# Altium PCB CU.PcbDoc
Units mil, origin at the board's own origin, x right, y up, seen from the top; angles counter-clockwise.
Board outline 1496.06 x 1259.84 mil, 2 copper layers (Top Layer, Bottom Layer); 59 components, 47 nets, 218 pads, 17 vias.
Unrouted connection lines stored in the file: 1.
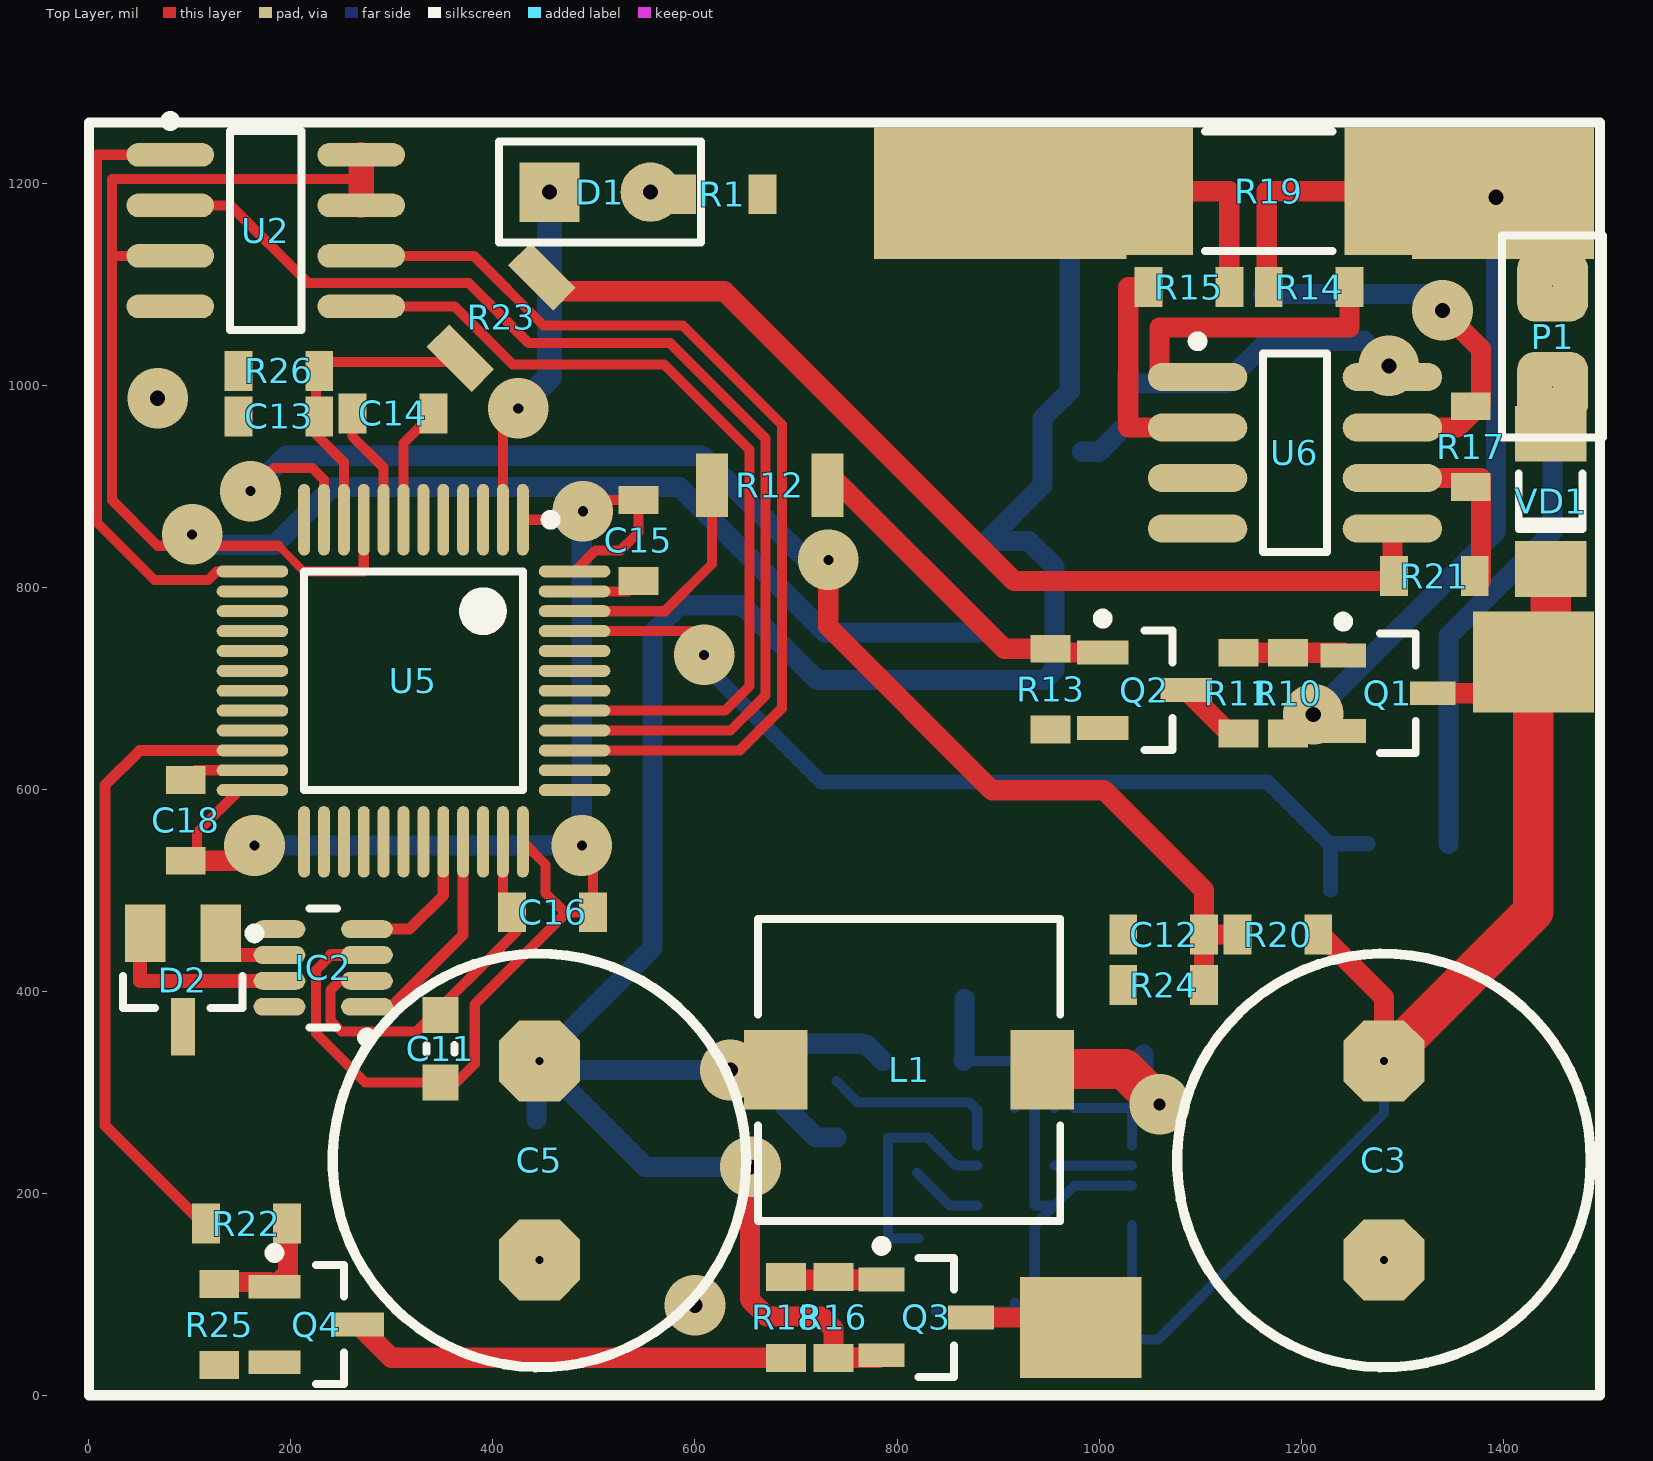
[diagram p0: Top Layer view]
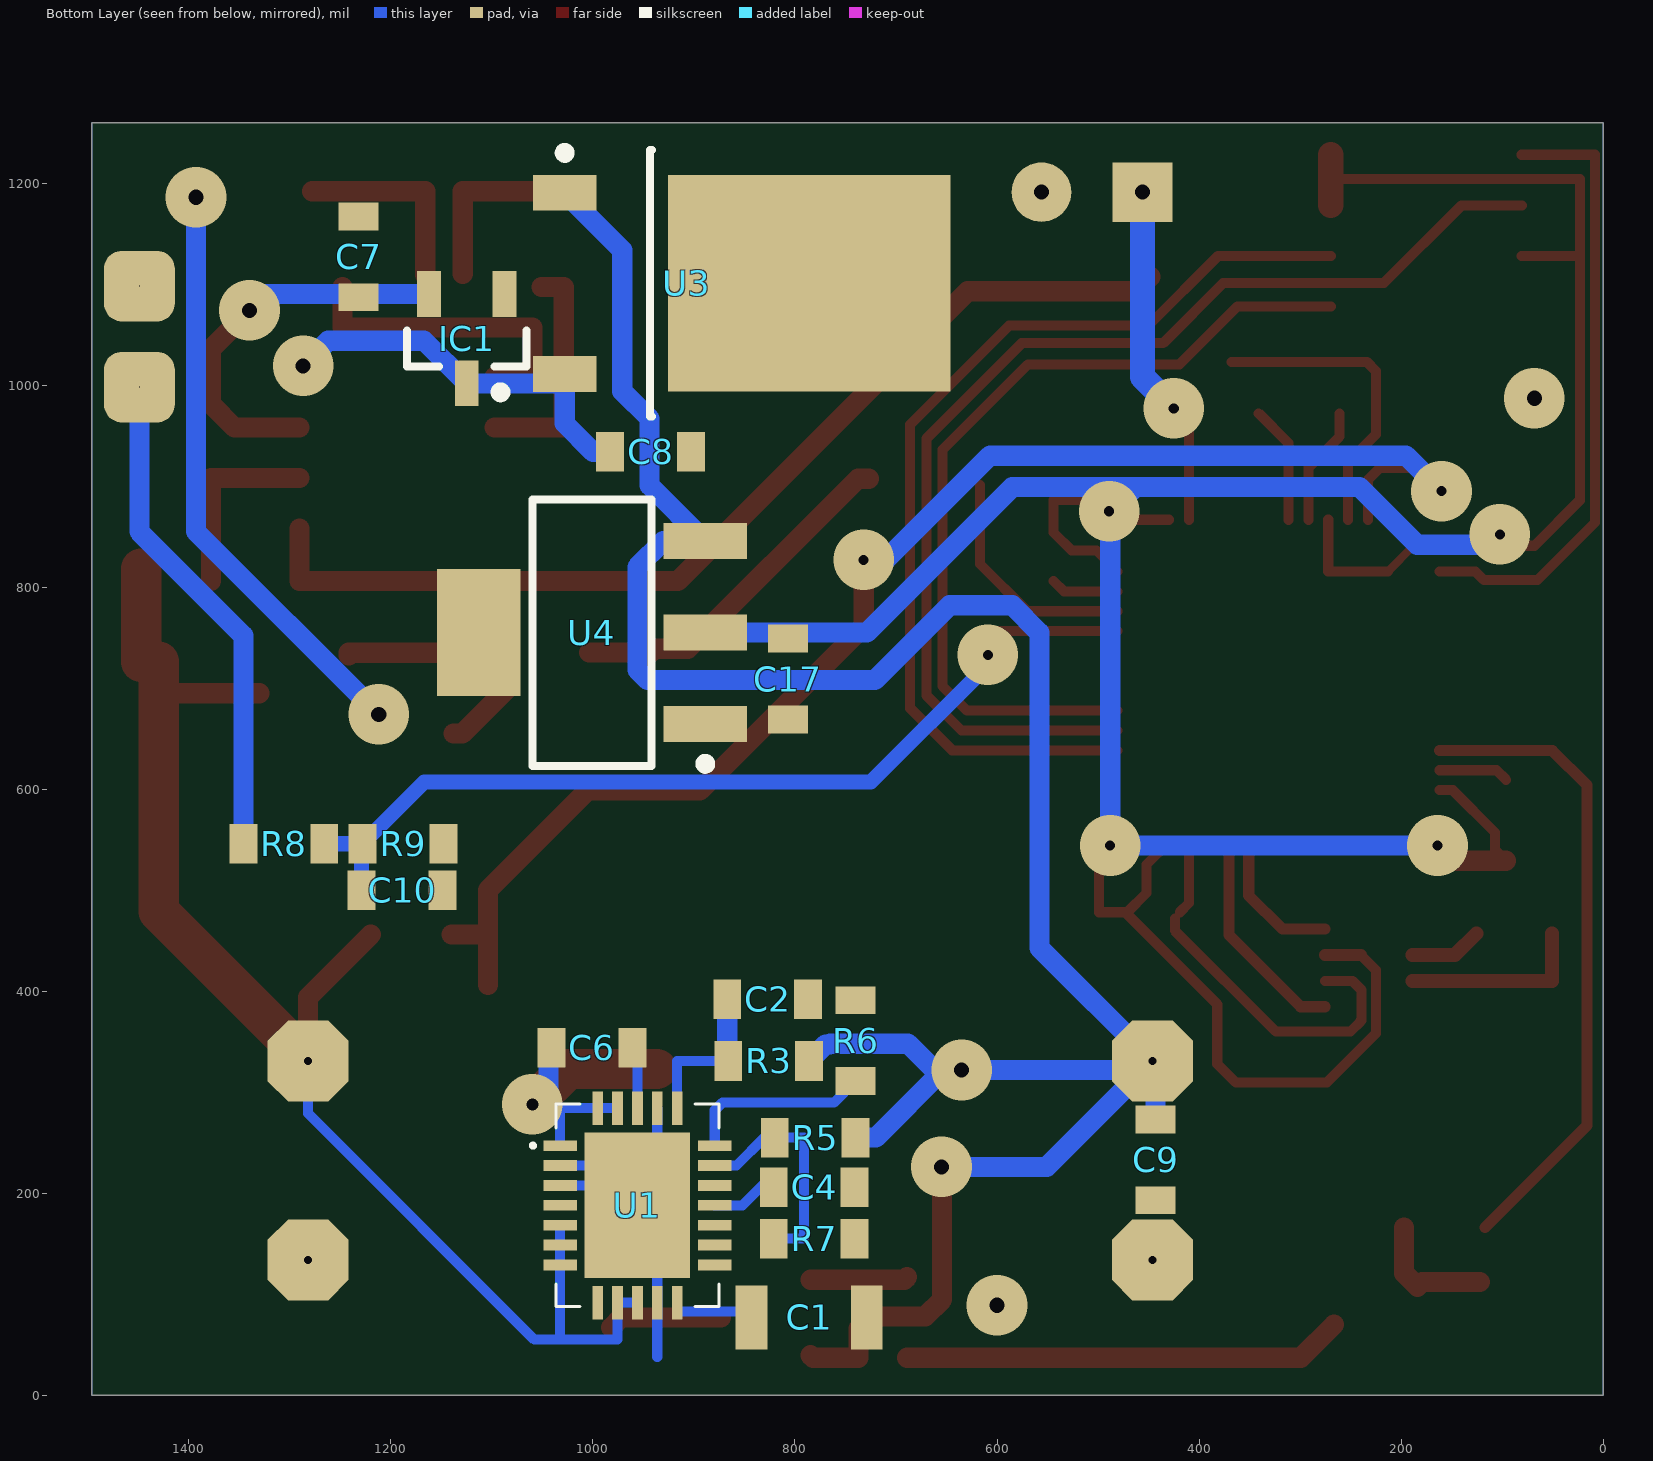
[diagram p1: Bottom Layer view, seen from below]

## Layer stack, top to bottom
Top Solder: solder mask 0.4, Solder Resist, Dk 3.5
Top Layer: signal copper 1.4
Dielectric 1: dielectric 12.6, FR-4, Dk 4.8
Bottom Layer: signal copper 1.4
Bottom Solder: solder mask 0.4, Solder Resist, Dk 3.5

## Board outline
0,0 0,1259.84 1496.06,1259.84 1496.06,0

## Design rules (kind name [scope] priority, off if disabled: settings)
Clearance [All] p1: gap=5 ignorepadtopadclearanceinfootprint=FALSE except(0: Arc-Hole Track-Hole SMDPad-Hole THPad-Hole Via-Hole Fill-Hole Poly-Hole Region-Hole Text-Hole; 10: Arc-Poly Track-Poly SMDPad-Poly THPad-Poly Via-Poly Fill-Poly Poly-Poly)
ComponentClearance [All] p1 off: gap=10 collisioncheckmode=3 verticalgap=10 showdistances=FALSE
Height [All] p1 off: minheight=0 maxheight=1000 prefheight=500
MinimumSolderMaskSliver [All] p1 off: minsoldermaskwidth=10
PolygonConnect [All] p1: connectstyle=Direct reliefconductorwidth=10 reliefentries=4 polygonreliefangle="90 Angle" airgapwidth=10
RoutingVias [All] p1: holewidth=28 width=60 viastyle="Through Hole" minholewidth=1 minwidth=1 maxholewidth=280 maxwidth=500
SilkToSilkClearance [All] p1 off: silktosilkclearance=10
SilkToSolderMaskClearance [IsPad] p1 off: minsilkscreentomaskgap=10 clearancetoexposedcopper=TRUE
SolderMaskExpansion [All] p1: expansion=4
Width [All] p1: maxlimit=200 minlimit=5 preferedwidth=10
25 further rules are at their usual default settings.

## Classes and differential pairs
net class CAN: CAN_RX CAN_TX

## Components (designator, comment, footprint, x,y, rotation, side; value= is the part's Value field where it differs from the comment)
C1 "10uF" 1206x 786,77 r180 bottom value=100pF
C2 "0.1u" 0603x 827,392 r180 bottom value=100pF
C3 "100u 63V" CAP_ELEC_10mm 1282,232.43 r0 top value=100pF
C4 "22nF" 0603x 781,206 r0 bottom value=100pF
C5 "1000u 25V" CAP_ELEC_10mm 446,232.43 r0 top value=100pF
C6 "0.1u" 0603x 1001,344 r0 bottom value=100pF
C7 "Cap" 0603x 1232,1127 r90 bottom value=10n
C8 "Cap" 0603x 943,934 r180 bottom value=10n
C9 "Cap" 0603x 443,233 r270 bottom value=10n
C10 "Cap" 0603x 1189,500 r180 bottom value=10n
C11 "0.1u" CAPC1608X08N(0603) 348,343 r270 top value="CAP CER 0.1UF 50V X7R 0603"
C12 "Cap" 0603x 1064,456 r180 top value=10n
C13 "Cap" 0603x 188,969 r180 top value=10n
C14 "Cap" 0603x 301,972 r0 top value=100nF
C15 "Cap" 0603x 543.98,846.17 r90 top value=100nF
C16 "Cap" 0603x 458.98,478.17 r0 top value=100nF
C17 "Cap" 0603x 807,709 r90 bottom value=100nF
C18 "Cap" 0603x 95.98,569.17 r270 top value=100nF
D1 "LED0" HDR1X2#1 456,1191 r0 top
D2 "NUP2105LT1G" SOT-23_M 93,411 r270 top
IC1 "LT1460KCS3-3.3" SOT23_N#1 1125,1046 r270 bottom value="Voltage reference 3.3V 0.5% 50ppm/C"
IC2 "TCAN332GDCNT" SOT23-8_L 232,423 r180 top
L1 "Inductor" DR74 812,322 r0 top value=33u
P1 "Header 2" HDR1X2#2 1449,1098 r270 top
Q1 "IRLML6401" Micro3_N 1286,695 r0 top
Q2 "2N7002" SOT23_N#2 1045,698 r0 top
Q3 "IRLML6401" Micro3_N 829,77 r0 top
Q4 "2N7002" SOT23_N#2 225,70 r0 top
R1 "Res1" 0603x 627,1189 r0 top value=1K
R3 "Res1" 0603x 826,331 r180 bottom value=4.7R
R5 "Res1" 0603x 780,255 r180 bottom value=18k
R6 "Res1" 0603x 740,351 r90 bottom value=18k
R7 "Res1" 0603x 781,155 r0 bottom value=18k
R8 "Res1" 0603x 1306,546 r0 bottom value=18k
R9 "Res1" 0603x 1188,546 r0 bottom value=18k
R10 "Res1" 0603x 1187,695 r90 top value=1K
R11 "Res1" 0603x 1138,695 r270 top value=1K
R12 "Res1" 1206x 674,901 r0 top value=1K
R13 "Res1" 0603x 952,699 r90 top value=1K
R14 "Res1" 0603x 1208,1097 r180 top value=1K
R15 "Res1" 0603x 1089,1097 r0 top value=1K
R16 "Res1" 0603x 737,77 r90 top value=1K
R17 "Res1" 0603x 1368,939 r270 top value=1K
R18 "Res1" 0603x 690,77 r270 top value=1K
R19 "Res1" 2512 1168,1192 r0 top value=10mR
R20 "Res1" 0603x 1177,456 r180 top value=1K
R21 "Res1" 0603x 1332,811 r180 top value=1K
R22 "Res1" 0603x 156,170 r0 top value=1K
R23 "Res1" 1206x 408,1067 r225 top value=1K
R24 "Res1" 0603x 1064,406 r180 top value=1K
R25 "Res1" 0603x 129,70 r90 top value=1K
R26 "Res1" 0603x 188,1014 r0 top value=1K
U1 "MAX17574ATG+" QFN50P500X400X80-25N 956,188 r180 bottom
U2 "25AA010A-I/MS" SO-8_N 175,1153 r0 top
U3 "LM78M05CDTX" TO-252AA_L 852.8,1100.76 r180 bottom
U4 "REG1117-3.3" SOt-223_L 1001,755 r0 bottom
U5 "STM32F303C8T6" LQFP48_N 321.29,707.27 r270 top
U6 "MAX9918" SO8_M 1194,933 r0 top
VD1 "Diode" SOD-80/MLL34 1447,884.93 r270 top

## Footprints (in the part's own frame and the unit in brackets; to place one, negate y for a bottom-side part, rotate by r counter-clockwise, add the part's x,y. Pads: shape width x height; smd on the part's side, far side on the other; paste and mask are expansions set on the pad)
0603x [mm] "Chip Resistor; Body 1.6 x 0.8 mm (LxW typ)"
  rect 0.7x1 smd: 1(-1.016,0) 2(1.016,0)
1206x [mm]
  rect 0.8x1.6 smd: 1(-1.45,0) 2(1.45,0)
2512 [mm] "Chip Resistor; Body 6.4 x 3.2 mm (LxW typ)"
  rect 1.8x3.2 smd: 1(-2.8,0) 2(2.8,0)
  silkscreen extent -1.6,-1.5 1.6,1.5
CAP_ELEC_10mm [mil]
  oct 80x80 hole 7.87: 1(0,98.43) 2(0,-98.43)
  silkscreen extent -205,-205 205,205
CAPC1608X08N(0603) [mm] "Chip Capacitor, 2-Leads, Body 1,60x0,80mm, IPC Medium Density"
  rect 0.9x0.9 smd: 1(-0.85,0) 2(0.85,0)
  silkscreen extent -0.1,-0.35 0.1,0.35, body extent -0.8,-0.4 0.8,0.4, height 0.8
DR74 [mm] "Precision Wire Wound Inductor, 2-Leads, Body 7,60x7,60mm, IPC High Density"
  rect 1.6x2 smd: 1(3.35,0) 2(-3.35,0)
  silkscreen extent -3.8,-3.8 3.8,3.8, body extent -3.8,-3.8 3.8,3.8, height 4.35
HDR1X2#1 [mm] "Connector; Header; 2 Position"
  rect 1.5x1.5 hole 0.381: 1(0,0)
  round 1.5 hole 0.381: 2(2.54,0)
  silkscreen extent -1.27,-1.27 3.81,1.27
HDR1X2#2 [mm] "Connector; Header; 2 Position"
  rrect50% 1.778x1.778 hole 0.025: 1(0,0) 2(2.54,0)
  silkscreen extent -1.27,-1.27 3.81,1.27
LQFP48_N [mm] "Thin QFP, 48-Leads, Body 7x7mm, Pitch 0.5mm, IPC Medium Density"
  oval 1.8x0.3 smd: 1(-4.05,2.75) 2(-4.05,2.25) 3(-4.05,1.75) 4(-4.05,1.25) 5(-4.05,0.75) 6(-4.05,0.25) 7(-4.05,-0.25) 8(-4.05,-0.75) 9(-4.05,-1.25) 10(-4.05,-1.75) 11(-4.05,-2.25) 12(-4.05,-2.75) 25(4.05,-2.75) 26(4.05,-2.25) 27(4.05,-1.75) 28(4.05,-1.25) 29(4.05,-0.75) 30(4.05,-0.25) 31(4.05,0.25) 32(4.05,0.75) 33(4.05,1.25) 34(4.05,1.75) 35(4.05,2.25) 36(4.05,2.75)
  oval 0.3x1.8 smd: 13(-2.75,-4.05) 14(-2.25,-4.05) 15(-1.75,-4.05) 16(-1.25,-4.05) 17(-0.75,-4.05) 18(-0.25,-4.05) 19(0.25,-4.05) 20(0.75,-4.05) 21(1.25,-4.05) 22(1.75,-4.05) 23(2.25,-4.05) 24(2.75,-4.05) 37(2.75,4.05) 38(2.25,4.05) 39(1.75,4.05) 40(1.25,4.05) 41(0.75,4.05) 42(0.25,4.05) 43(-0.25,4.05) 44(-0.75,4.05) 45(-1.25,4.05) 46(-1.75,4.05) 47(-2.25,4.05) 48(-2.75,4.05)
  silkscreen extent -4.17,-2.75 2.75,3.58, body extent -3.5,-3.5 3.5,3.5, height 1.6
Micro3_N [mm] "SOT23, 3-Leads, Body 2.9x1.3mm, Pitch 0.95mm, Lead Span 2.3mm, IPC Medium Density"
  rect 1.15x0.6 smd: 1(-1.125,0.95) 2(-1.125,-0.95) 3(1.125,0)
  silkscreen extent -1.25,-1.5 0.7,1.92, body extent -0.7,-1.5 0.7,1.5, height 1.12
QFN50P500X400X80-25N [mm]
  rect 0.84x0.27 smd: 1(-1.945,1.5) 2(-1.945,1) 3(-1.945,0.5) 4(-1.945,0) 5(-1.945,-0.5) 6(-1.945,-1) 7(-1.945,-1.5) 13(1.945,-1.5) 14(1.945,-1) 15(1.945,-0.5) 16(1.945,0) 17(1.945,0.5) 18(1.945,1) 19(1.945,1.5)
  rect 0.27x0.84 smd: 8(-1,-2.445) 9(-0.5,-2.445) 10(0,-2.445) 11(0.5,-2.445) 12(1,-2.445) 20(1,2.445) 21(0.5,2.445) 22(0,2.445) 23(-0.5,2.445) 24(-1,2.445)
  rect 2.65x3.65 smd: 25(0,0)
  silkscreen extent -2.68,-2.55 2.05,2.55
SO8_M [mm] "SOIC, 8-Leads, Body 4.9x3.9mm, Pitch 1.27mm, IPC Low Density"
  oval 2.5x0.7 smd: 1(-2.45,1.905) 2(-2.45,0.635) 3(-2.45,-0.635) 4(-2.45,-1.905) 5(2.45,-1.905) 6(2.45,-0.635) 7(2.45,0.635) 8(2.45,1.905)
  silkscreen extent -2.57,-2.5 0.8,2.93, body extent -2,-2.5 2,2.5, height 1.75
SO-8_N [mm] "SOIC, 8-Leads, Body 4.9x3.9mm, Pitch 1.27mm, IPC Medium Density"
  oval 2.2x0.6 smd: 1(-2.4,1.905) 2(-2.4,0.635) 3(-2.4,-0.635) 4(-2.4,-1.905) 5(2.4,-1.905) 6(2.4,-0.635) 7(2.4,0.635) 8(2.4,1.905)
  silkscreen extent -2.52,-2.5 0.9,2.88, body extent -2,-2.5 2,2.5, height 1.75
SOD-80/MLL34 [mm] "Metal Electrode Face (MELF) Diode; Body 3.5 x 1.7 mm (LxDia)"
  rect 1.4x1.8 smd: 1(-1.7,0) 2(1.7,0)
  silkscreen extent -0.7,-0.8 0.7,0.8
SOT23-8_L [mm] "SOP, 8-Leads, Body 2.9x1.6mm, Pitch 0.65mm, IPC High Density"
  oval 1.3x0.45 smd: 1(-1.1,0.975) 2(-1.1,0.325) 3(-1.1,-0.325) 4(-1.1,-0.975) 5(1.1,-0.975) 6(1.1,-0.325) 7(1.1,0.325) 8(1.1,0.975)
  silkscreen extent -1.22,-1.5 0.35,1.87, body extent -0.88,-1.5 0.88,1.5, height 1.45
SOT23_N#1 [mm] "SOT23, 3-Leads, Body 2.9x1.3mm, Pitch 0.95mm, Lead Span 2.3mm - Reverse Pinning, IPC Medium Density"
  rect 1.15x0.6 smd: 1(1.125,0) 2(-1.125,-0.95) 3(-1.125,0.95)
  silkscreen extent -0.2,-1.5 1.47,1.5, body extent -0.7,-1.5 0.7,1.5, height 1.1
SOT23_N#2 [mm] "SOT23, 3-Leads, Body 2.9x1.3mm, Pitch 0.95mm, Lead Span 2.3mm, IPC Medium Density"
  rect 1.3x0.6 smd: 1(-1.05,0.95) 2(-1.05,-0.95) 3(1.05,0)
  silkscreen extent -1.17,-1.5 0.7,1.92, body extent -0.7,-1.5 0.7,1.5, height 1.1
SOT-23_M [mm] "SOT23, 3-Leads, Body 2.9x1.3mm, Pitch 0.95mm, Lead Span 2.5mm, IPC Low Density"
  rect 1.45x1.016 smd: 1(-1.175,0.95) 2(-1.175,-0.95)
  rect 1.45x0.6 smd: 3(1.175,0)
  silkscreen extent -1.3,-1.5 0.7,1.93, body extent -0.7,-1.5 0.7,1.5, height 1.1
SOt-223_L [mm] "SOT223, 4-Leads, Body 6.5x3.5mm, Pitch 2.3mm, Lead Span 7mm, IPC High Density"
  rect 2.1x0.9 smd: 1(-2.85,2.3) 2(-2.85,0) 3(-2.85,-2.3)
  rect 2.1x3.2 smd: 4(2.85,0)
  silkscreen extent -2.97,-3.35 1.5,3.42, body extent -1.85,-3.35 1.85,3.35, height 1.8
TO-252AA_L [mm] "D-PAK, 4-Leads, Body 6.1x6.5mm, Pitch 2.28mm, Lead Span 9.9mm, IPC High Density"
  rect 1.6x0.9 smd: 1(-4.45,2.28) 3(-4.45,-2.28)
  rect 7.1x5.45 smd: 4(1.7,0)
  silkscreen extent -4.57,-3.35 -2.25,3.4, body extent -2.3,-3.37 4.05,3.37, height 2.38

## Part data
C1 C2 C3 C4 C5 C6: library part Cap, "Capacitor", LatestRevisionDate=17-Jul-2002, LatestRevisionNote="Re-released for DXP Platform.", PackageDescription="Radial Cap, Thru-Hole; 2 Leads; 0.3 in Pin Spacing", PackageReference=RAD-0.3, Published=8-Jun-2000, Publisher="Altium Limited"
C7 C8 C9 C10 C12 C13 C14 C15 C16 C17 C18: "Capacitor", LatestRevisionDate=17-Jul-2002, LatestRevisionNote="Re-released for DXP Platform.", PackageDescription="Radial Cap, Thru-Hole; 2 Leads; 0.3 in Pin Spacing", PackageReference=RAD-0.3, Published=8-Jun-2000, Publisher="Altium Limited"
C11: library part "Ceramic Chip Capacitor", Package=0603, Distributor="AVX Corporation", Order Number=06035C104KAT2A
D1: "Typical INFRARED GaAs LED", LatestRevisionDate=08-Jul-2005, LatestRevisionNote="Mech Layer 1 removed.", PackageDescription="LED; 2 Leads", PackageReference=LED-0, Published=8-Jun-2000, Publisher="Altium Limited"
D2: library part BAT54A, "Schottky Barrier Double Diode", Package=SOT23, ComponentLink1Description="Manufacturer Link", ComponentLink1URL=http://www.semiconductors.philips.com/, Distributor="ON Semiconductor", LatestRevisionNote="IPC-7351 Footprint Added.", Order Number=NUP2105LT1G, PackageDescription="3-Pin SOT-23 Package 0.95 mm Pitch, 2.3 mm Lead Span"
IC1: library part PreciseRef, Package=SOT23, Distrubutor="Linear Technology", Order Number=LT1460KCS3-3.3#TRMPBF
IC2: Package=SOT23-8, Distributor="Texas Instruments", Order Number=TCAN332GDCNT
P1: "Header, 2-Pin", LatestRevisionDate=17-Jul-2002, LatestRevisionNote="Re-released for DXP Platform.", Publisher="Altium Limited"
Q1 Q3: "HEXFET Power MOSFET", ComponentLink1Description="Manufacturer Link", ComponentLink1URL=http://www.irf.com/, ComponentLink2Description=Datasheet, ComponentLink2URL=http://www.irf.com/product-info/datasheets/data/IRLML6401.pdf, DatasheetVersion=2-Jul-2001, PackageDescription="3-Pin SOT-23 Package 0.95 mm Pitch, 2.3 mm Lead Span", PackageReference=Micro3, PackageVersion=Jul-2001, Published=17-Sep-2003, Publisher="Altium Limited"
Q2 Q4: "N-channel Enhancement Mode Field-effect Transistor", ComponentLink1Description="Manufacturer Link", ComponentLink1URL=http://www.semiconductors.philips.com/, ComponentLink2Description=Datasheet, ComponentLink2URL=http://www.semiconductors.philips.com/acrobat/datasheets/2N7002_4.pdf, DatasheetVersion=27-Jul-2000, LatestRevisionDate=12-Dec-2006, LatestRevisionNote="IPC-7351 Footprint Added.", PackageDescription="3-Pin SOT-23 Package 0.95 mm Pitch, 2.3 mm Lead Span", PackageReference=SOT23, PackageVersion=May-1999, Published=17-Sep-2003, Publisher="Altium Limited"
R1 R3 R5 R6 R7 R8 R9 R10 R11 R12 R13 R14 R15 R16 R17 R18 R19 R20 R21 R22 R23 R24 R25 R26: "Resistor", LatestRevisionDate=17-Jul-2002, LatestRevisionNote="Re-released for DXP Platform.", PackageDescription="Axial Device, Thru-Hole; 2 Leads; 0.3 in Pin Spacing", PackageReference=AXIAL-0.3, Published=8-Jun-2000, Publisher="Altium Limited"
U1: "IC REG BUCK ADJ 3A SYNC 24TQFN", Package="TQFN-24 Maxim Integrated", Digi-Key_Part_Number=MAX17574ATG+-ND, Digi-Key_Purchase_URL=https://www.digikey.com/product-detail/en/maxim-integrated/MAX17574ATG-/MAX17574ATG--ND/6579157?WT.z_cid=ref_snapeda&utm_source=snapeda&utm_medium=aggregator&utm_campaign=buynow, MF="Maxim Integrated", MP=MAX17574ATG+
U2: "1K SPI Bus Serial EEPROM, 8-Pin MSOP, Industrial Temperature", Supplier Part Number 1=25AA010A-I/MS-ND, ComponentLink1Description=Datasheet, ComponentLink1URL=http://ww1.microchip.com/downloads/en/DeviceDoc/21832E.pdf, ComponentLink2Description="Packaging Specification", ComponentLink2URL=http://www.microchip.com/stellent/groups/techpub_sg/documents/packagingspec/en012702.pdf, ComponentLink3Description="Microchip.com Home", ComponentLink3URL=http://www.microchip.com/, DatasheetVersion="revE, Sep-2008", LatestRevisionDate=02-Dec-2009, LatestRevisionNote="Updated to datasheet revision E, Jan-2008", PackageDescription="8-Lead Plastic Micro Small Outline Package (MS) [MSOP]", PackageReference=MSOP-MS8, PackageVersion="revBB, Aug-2009", Published=29-Jan-2009, Publisher="Altium Limited", Supplier 1=Digi-Key, Supplier 2=Farnell, Supplier Part Number 2=1331337
U3: "3-Terminal Positive Voltage Regulators, 3-pin TO-252", Manufacturer="National Semiconductor", PackageTopMarking=NSUZXYTT*LM78M05*CDT, PowerWise=N, Code_JEDEC=TO-252-AA, ComponentLink1Description="LM78M05 Datasheet", ComponentLink1URL=http://www.national.com/ds/LM/LM78M05.pdf, ComponentLink2Description="LM78M05 Web Page", ComponentLink2URL=http://www.national.com/pf/LM/LM78M05.html, ComponentLink3Description="TD03B Package Page", ComponentLink3URL=http://www.national.com/packaging/folders/td03b.html, CompType="LDO IC", DatasheetVersion=Aug-2005, PackageDescription="TO252, Molded, Jedec, 6.8 x 6.10 x 2.30mm Body, 3 Lead, 2.28mm Pitch, Surface Mount", PackageReference=TD03B, PackageVersion="revD, Feb-2009", PartNumber=LM78M05CDTX, PinCount=3, Published=1-Mar-2010, Publisher="Altium Limited", RoHS=N
U4: "800mA and 1A Low Dropout Positive Regulator 2.85V, 3.3V, 5V, and Adjustable", ComponentLink1Description="Manufacturer Link", ComponentLink1URL=http://www.ti.com/, ComponentLink2Description=Datasheet, ComponentLink2URL=http://www-s.ti.com/sc/ds/REG1117.pdf, DatasheetVersion=Sep-1997, LatestRevisionDate=17-Jul-2002, LatestRevisionNote="Re-released for DXP Platform.", PackageDescription="SOT-223/SC-73; 4 Leads; Body 6.7 x 7.3 mm, inc. leads (LxW max)", PackageReference=ZZ311, PackageVersion=revC, Published=8-Jun-2000, Publisher="Altium Limited"
U5: library part STM32F103C6T6, "STM32 ARM-based 32-bit MCU with 32 Kbytes Flash, 48-pin LQFP, Industrial Temperature", ComponentLink1Description="Manufacturer Link", ComponentLink1URL=www.st.com/stm32, ComponentLink2Description=Datasheet, ComponentLink2URL=http://www.st.com/stonline/products/literature/ds/13587.pdf, DatasheetVersion="rev6, Mar-2008", PackageDescription="48-Pin Low-Profile Quad Flat Pack, 7 x 7 mm Body, 0.5 mm Pitch (LQFP48)", PackageReference=LQFP48, PackageVersion=Mar-2008, Published=30-May-2008, Publisher="Altium Limited"
VD1: "Default Diode", Code_JEDEC=DO-214-AB, LatestRevisionDate=17-Jul-2002, LatestRevisionNote="Re-released for DXP Platform.", PackageDescription="DO-214-AB/SMC; 2 C-Bend Leads; Body 7.9 x 5.9 mm, inc. leads (LxW)", PackageReference=SMC, PackageVersion=Sep-1996, Published=8-Jun-2000, Publisher="Altium Limited"
L1: Code_IEC=1005, Code_JEITA=0402, LatestRevisionDate=29-May-2009, LatestRevisionNote="IPC-7351 Footprint Added.", PackageDescription="Chip Inductor", PackageReference=0402-A, Published=8-Jun-2000, Publisher="Altium Limited"

## Free pads (board coordinates)
  rect 250x130 smd: 2(902,1190)
  rect 180x130 smd: 2(1400,1190)
  rect 120x100 smd: 2(1430,726) 3(982,67)

## Via types
v1: diameter 60, hole 15, Top Layer to Bottom Layer, 8 vias
v2: diameter 60, hole 10, Top Layer to Bottom Layer, 8 vias
v3: diameter 60, hole 11.81, Top Layer to Bottom Layer, 1 vias

## Nets (pads, with @x,y where several pads share a name; then routed paths per layer and width w, separated by ;. In a path a pad name is that pad's centre, name@x,y a point inside that pad or via, vN(x,y) a via of type N, cw(c..) or ccw(c..) an arc to the next point about the centre after c; other vN are vias at no path point)
3V3: C11.2 C15.2 C16.2 C17.2 C18.2 IC2.3 U2.3 U2.7 U2.8 U4.2 U4.4 U5.1 U5.9 U5.24 U5.36 U5.48 | length 3658.7
  Top Layer w8: 187.56,841 213.02,815.54
  Top Layer w10: U2.3 23,1128 ; C18.2 106.98,540.17 106.98,557.17 148.81,599 U5.24 ; 187.56,841 68,841 23,886 23,1128 ; 213.02,815.54 272.08,815.54 U5.9 ; 239.8,435.8 225,421 225,358 273.46,309.54 C11.2 363.54,309.54 382,328 382,387 473.17,478.17 ; 269.49,1213.49 260,1204 23,1204 23,1128 ; U5.36 451.98,525.4 451.98,497.17 470.98,478.17 473.17,478.17 ; U5.1 480.53,866.72 v2(488.98,875.17) 499.98,886.17 C15.2 543.98,854.17 525.98,836.17 501.37,836.17 U5.48 ; v2(487.98,544.17) 498.98,533.17 C16.2 473.17,478.17
  Top Layer w12: 239.8,435.8 IC2.3
  Top Layer w20: C18.2 148.98,529.17 v2(163.98,544.17)
  Top Layer w25: U2.7 269.49,1213.49 U2.8
  Bottom Layer w20: v2(102.19,852.19) 112.37,842 184,842 241,899 463.14,899 ; v2(163.98,544.17) v2(487.98,544.17) 487.98,874.17 463.14,899 ; U4.2 729,755 585,899 463.14,899
5V: C8.1 IC1.1 U3.3 U6.8 | length 408.8
  Top Layer w20: v1(1287,1019) 1287,1011.46 U6.8
  Bottom Layer w20: C8.1 1000,934 1028,962 U3.3 1037.29,1001.71 IC1.1 1167.29,1044 1262,1044 v1(1287,1019)
12V: C5.1 C9.1 L1.2 Q3.2 R3.2 R5.2 R16.1 U3.1 U4.3 | length 2576.5
  Top Layer w20: v1(655,226) 654.31,225.31 654.31,94.69 671,78 725,78 737,66 R16.1 782.11,37 Q3.2
  Bottom Layer w20: C9.1 443,327.85 C5.1 ; v1(655,226) 550.85,226 C5.1@454.85,322 ; R5.2 720,255 v1@653,322 ; R3.2 769.69,347.31 765.32,347.31 765.32,348 688,348 662,322 v1@653,322 ; U3.1 971,1133.53 971,994 944,967 944,900.76 U4.3 930.45,845.55 956,820 956,718 946,708 721,708 647,782 585,782 558,755 558,442.85 C5.1 ; C5.1 C5.1@454.85,322 ; C5.1@454.85,322 v1(635,322) v1@653,322
48S: P1.1 pad.2@1400,1190 Q1.2 R10.1 R14.2 R19.2 | length 798.6
  Top Layer w20: R14.2@1166,1109 1166,1192 R19.2 ; v1@1212,657.6 v1(1212,674)
  Bottom Layer w20: v1(1212,674) 1393,855 v1(1393,1186)
48V: C3.1 pad.2@1430,726 Q1.3 R20.1 U1.5 U1.6 U1.7 U1.9 U1.10 VD1.2 | length 1453.4
  Top Layer w20: R20.1@1220,456 1282,394 C3.1 ; Q1.3 pad.2@1430,695
  Top Layer w40: C3.1 1430,478.85 1430,695 1430,726 1447,726 VD1.2
  Bottom Layer w10: U1.10 U1.9 975.68,55 1032.57,55 ; U1.5 U1.6 U1.7 1032.57,55 ; C3.1@1282,329 1282,279 1058,55 1032.57,55
  Bottom Layer w20: C3.1 C3.1@1295.15,344
48V_CONN: pad.2@902,1190 R15.2 R19.1 | length 153.2
  Top Layer w20: R19.1 1129,1192 R15.2@1129,1110
BTN: C10.1 R8.1 R9.2 U5.45 | length 931.7
  Top Layer w10: U5.45 597.52,756.48 609,745 v2(609,733)
  Bottom Layer w15: v2(609,733) 609,723 725,607 1167,607 R9.2 ; C10.1 1229,545 R9.2 ; R8.1 R9.2
C\S\: U2.1 U5.13 | length 617.5
  Top Layer w10: U2.1 8,1228 8,864 65,807 118,807 126.54,815.54 U5.13
CAN_H: D2.2 IC2.7 | length 185.1
  Top Layer w14: D2.2@50.6,457.26 50.6,410.2 IC2.7
CAN_L: D2.1 IC2.6 | length 72.2
  Top Layer w14: D2.1@125.4,457.26 146.87,435.79 IC2.6
CAN_RX: IC2.4 U5.32 | length 142.4
  Top Layer w11: IC2.4 317.39,461.39 350.82,494.82 U5.32
CAN_TX: IC2.1 U5.33 | length 216.9
  Top Layer w11: IC2.1 299.61,384.61 370.5,455.5 U5.33
GND: C1.2 C2.2 C3.2 C4.1 C5.2 C7.2 C8.2 C9.2 C10.2 C11.1 C12.2 C13.2 C14.1 C15.1 C16.1 C17.1 C18.1 D2.3 IC1.3 IC2.2 Q2.2 Q4.2 R1.2 R6.2 R7.1 R9.1 R13.1 R24.2 R25.1 R26.1 U1.2 U1.3 U1.11 U1.21 U1.25 U2.4 U3.4 U4.1 U5.8 U5.23 U5.35 U5.44 U5.47 U6.3 U6.4 | length 1076.9
  Top Layer w10: C18.1 105.5,618.69 U5.23 ; 239,371 239,401 248.2,410.2 IC2.2 ; 240,371 240,370 250,360 324,360 423.91,459.91 C16.1@423.91,472.09 ; C14.1 261,949 291.76,918.24 U5.8 ; U5.35 409.87,487.27 C16.1 ; U5.47 533.66,795.85 C15.1
  Bottom Layer w10: 936.31,38.05 U1.11 936.31,168.32 U1.25 ; U1.21 936.31,188 U1.25 ; U1.25@956,227.37 U1.2 ; U1.3 975.68,207.68 U1.25
  other v1: 600,89 68,987
I_SNS: C13.1 R23.2 R26.2 U5.10 | length 305
  Top Layer w10: U5.10 252.39,923.61 225,951 225,1014 234,1023 R23.2@367.63,1023
LED: D1.1 U5.2 | length 329.1
  Top Layer w10: U5.2 v2@409.87,969
  Bottom Layer w25: v2(425,977) 456,1008 D1.1
LIGHT: pad.3 Q3.3 | length 112.9
  Top Layer w20: Q3.3 972,77 pad.3
NetC1_1: C1.1 U1.12 | length 87.3
  Bottom Layer w10: C1.1@838.09,83 916.63,83 U1.12
NetC2_1: C2.1 R3.1 U1.20 | length 155.8
  Bottom Layer w10: R3.1@869,331 916.63,331 U1.20
  Bottom Layer w20: R3.1 867,332 C2.1
NetC4_2: C4.2 U1.16 | length 72.7
  Bottom Layer w10: C4.2@820,220 852,188 U1.16
NetC6_1: C6.1 U1.22 | length 63.7
  Bottom Layer w10: U1.22 956,337 C6.1@967,337
NetC6_2: C6.2 L1.1 U1.1 U1.23 U1.24 | length 287.2
  Top Layer w40: L1.1@937,323 1025,323 v3(1060,288)
  Bottom Layer w10: U1.23 U1.24 1032.57,284.26 U1.1
  Bottom Layer w20: C6.2@1044,337 1044,304 v3(1060,288)
NetC14_2: C14.2 U5.7 | length 117.5
  Top Layer w10: U5.7 311.45,942.45 C14.2
NetD1_2: D1.2 R1.1
NetP1_2: P1.2 R8.2 VD1.1 | length 494.7
  Bottom Layer w20: R8.2 1346,752 1449,855 P1.2
NetQ1_1: Q1.1 R10.2 R11.1 | length 106.3
  Top Layer w20: R11.1 R10.2 1241.71,735 Q1.1
NetQ2_1: Q2.1 R12.2 R13.2 | length 356
  Top Layer w20: R12.2@727,907.37 737.63,907.37 906,739 R13.2 ; R13.2@942.4,735.4 Q2.1
NetQ2_3: Q2.3 R11.2 | length 69.5
  Top Layer w20: Q2.3 1129.34,655 R11.2
NetQ3_1: Q3.1 R16.2 R18.1 | length 96.8
  Top Layer w20: R18.1@689,117 691.6,114.4 Q3.1
NetQ4_1: Q4.1 R22.2 R25.2 | length 127.7
  Top Layer w10: Q4.1@179.06,112 Q4.1
  Top Layer w20: R25.2@122,112 Q4.1@179.06,112 ; Q4.1 197,120.74 R22.2@197,166
NetQ4_3: Q4.3 R18.2 | length 436.3
  Top Layer w20: Q4.3 299.34,37 R18.2@689,37
NetR5_1: R5.1 R7.2 U1.18 | length 229.9
  Bottom Layer w10: R7.2 791,155 791,255 R5.1 830.32,255 857.94,227.37 U1.18
NetR6_1: R6.1 U1.19 | length 186.4
  Bottom Layer w10: R6.1 761.37,289.63 871.89,289.63 879.43,282.09 U1.19
NetR14_1: R14.1 U6.1 | length 314.5
  Top Layer w20: U6.1 1060,1008 1060,1057 1248,1057 R14.1
NetR15_1: R15.1 U6.2 | length 229.5
  Top Layer w20: R15.1@1051,1097 R15.1 1029,1097 1029,958 U6.2
NetR17_2: R17.2 R21.1 U6.6 | length 189.5
  Top Layer w20: U6.6 1378,908 R21.1@1378,806
NetR21_2: R21.2 R23.1 U6.5 | length 1018.9
  Top Layer w20: R23.1 462.73,1093 629,1093 916,806 1290.46,806 U6.5
POWER: R12.1 U5.46 | length 233.6
  Top Layer w10: U5.46 570.17,776.17 616.91,822.91 R12.1
PWM_LIGHT: R22.1 U5.22 | length 639.9
  Top Layer w11: R22.1@117,166 16,267 16,604 50.37,638.37 U5.22
SCK: U2.6 U5.39 | length 989.2
  Top Layer w10: U2.6 381,1128 450,1059 588,1059 686,961 686,680 644.37,638.37 U5.39
SCL: U5.6
SDA: U5.5
SI: U2.5 U5.41 | length 860.6
  Top Layer w10: U2.5 362,1078 419.5,1020.5 569.5,1020.5 654,936 654,702 629.74,677.74 U5.41
SO: U2.2 U5.40 | length 1142.9
  Top Layer w10: U2.2 140,1178 217,1101 376,1101 435.5,1041.5 575.5,1041.5 670,947 670,693 635.06,658.06 U5.40
SWCLK: U5.37
SWDIO: U5.34
V_SNS: C12.1 R20.2 R24.1 U5.11 | length 1431.9
  Top Layer w10: v2(160,895) 183,918 221,918 232.71,906.29 U5.11
  Top Layer w20: v2(732,827) 732,761 894,599 1005,599 1104,500 C12.1 ; R24.1 C12.1 ; R20.2@1140,456 R20.2 C12.1
  Bottom Layer w20: v2(160,895) 195,930 607,930 710,827 v2(732,827)
Vref: C7.1 IC1.2 R17.1 U6.7 | length 390.2
  Top Layer w20: U6.7 1355,958 1378,981 1378,1036 v1(1340,1074)
  Bottom Layer w20: IC1.2 1323.71,1090.29 v1(1340,1074)
pads on no net: IC2.5 IC2.8 U1.4 U1.8 U1.13 U1.14 U1.15 U1.17 U5.3 U5.4 U5.12 U5.14 U5.15 U5.16 U5.17 U5.18 U5.19 U5.20 U5.21 U5.25 U5.26 U5.27 U5.28 U5.29 U5.30 U5.31 U5.38 U5.42 U5.43

## Polygon pours and split planes (outlines as drawn)
GND on Bottom Layer "G" (solid, remove dead copper, shelved, pour order 2): 0,0 0,1259.84 1496.06,1259.84 1496.06,0
GND on Top Layer "G" (solid, remove dead copper, shelved, pour order 0): 0,0 0,1259.84 1496.06,1259.84 1496.06,0

## Other copper
Top Layer:
  text "32H x 38W" at 477,1904 h60

## Silkscreen, mask and mechanical layers (free items; w line width, h text height)
Top Overlay:
  the board outline again, w10